# Altium PCB Inverter Processor PCB.PcbDoc (part 3 of 3)
Units mm, origin at the board's own origin, x right, y up, seen from the top; angles counter-clockwise.
Board outline 180 x 80 mm, 4 copper layers (Top Layer, Internal Plane 1, Internal Plane 2, Bottom Layer); 207 components, 146 nets, 658 pads, 294 vias.
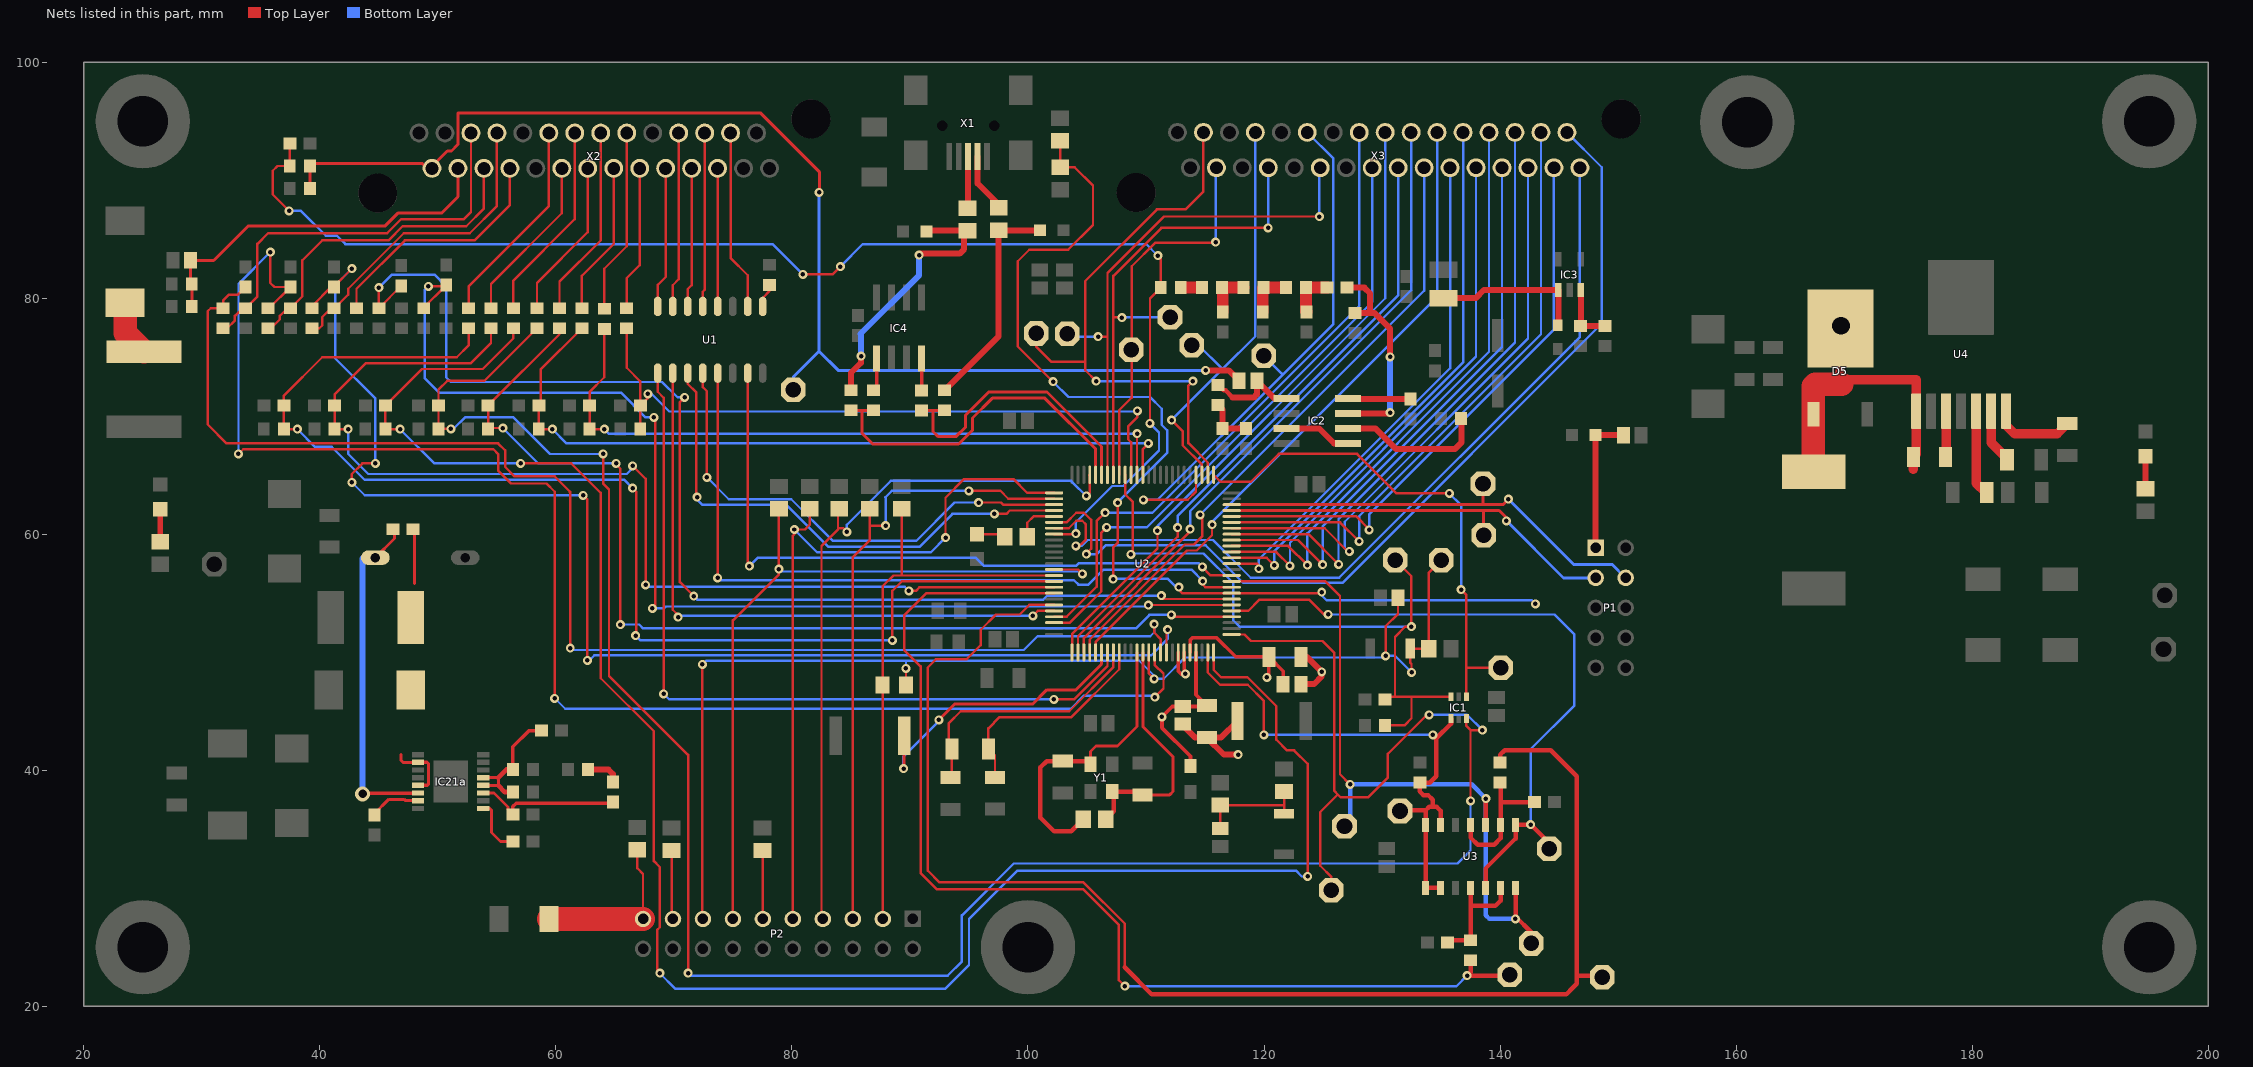
[diagram p4: the nets of this part, all layers, seen from the top]

## Via types
v1: diameter 0.762, hole 0.381, Top Layer to Bottom Layer, 220 vias
v2: diameter 1.27, hole 0.711, Top Layer to Bottom Layer, 56 vias
v3: diameter 1, hole 0.5, Top Layer to Bottom Layer, 7 vias
v4: diameter 2, hole 1, Top Layer to Bottom Layer, 7 vias
v5: diameter 3, hole 1.5, Top Layer to Bottom Layer, 2 vias
v6: diameter 1.27, hole 0.7, Top Layer to Bottom Layer, 1 vias
v7: diameter 1, hole 0.381, Top Layer to Bottom Layer, 1 vias

## Nets (pads, with @x,y where several pads share a name; then routed paths per layer and width w, separated by ;. In a path a pad name is that pad's centre, name@x,y a point inside that pad or via, vN(x,y) a via of type N, cw(c..) or ccw(c..) an arc to the next point about the centre after c; other vN are vias at no path point) (continued)
ENC_Z/R1: C24.2 R70.2 R73.2 TP37.TP X2.2 | length 107.6
  Top Layer w0.254: R70.2@39.15,89.3 R73.2@39.15,91.2 39.35,91.4 48.7,91.4 X2.2@49.1,91 ; X2.2@49.5,91.181 50.8,92.481 51.156,92.481 51.689,93.015 51.689,95.707 77.318,95.707 82.321,90.703 82.321,89.002 v1(82.296,88.976)
  Top Layer w0.508: X2.2@49.1,91 X2.2@49.5,91 X2.2@49.5,91.181 ; v1(115.062,73.889) 117.011,73.889 C24.2@117.9,73
  Bottom Layer w0.254: TP37.TP@80.112,72.238 80.112,73.33 82.296,75.514 ; v1(82.296,88.976) 82.296,75.514 ; v1(115.062,73.889) 83.922,73.889 82.296,75.514
  Bottom Layer w0.508: X2.2@49.5,91 X2.2@49.5,91.5
FLT_UH: U2.97 X3.15 | length 54.7
  Top Layer w0.203: U2.97@102.21,53.007 103.274,53.007 105.816,55.55 105.816,61.112 v1(106.528,61.824)
  Bottom Layer w0.203: v1(106.528,61.824) 110.541,61.824 128.066,79.349 X3.15@128.066,94.045
FLT_UL: U2.98 X3.16 | length 52.5
  Top Layer w0.203: U2.98@102.21,52.507 103.561,52.507 106.223,55.169 106.223,60.147 v1(106.655,60.579)
  Bottom Layer w0.203: v1(106.655,60.579) 110.058,60.579 129.166,79.687 X3.16@129.166,91.049
FLT_VH: U2.5 X3.21 | length 56.5
  Top Layer w0.203: U2.5@105.735,49.982 105.735,50.871 113.487,58.623 114.3,58.623 115.595,59.919 v1(115.595,60.808)
  Bottom Layer w0.203: v1(115.595,60.808) 115.595,61.036 134.666,80.107 X3.21@134.666,94.049
FLT_VL: U2.38 X3.22 | length 43.3
  Top Layer w0.203: U2.38@117.26,57.507 119.404,57.507 119.558,57.353 v1(119.558,57.074)
  Bottom Layer w0.203: v1(119.558,57.074) 119.558,57.861 135.766,74.07 X3.22@135.766,91.049
FLT_WH: U2.43 X3.27 | length 52.9
  Top Layer w0.203: U2.43@117.26,60.007 123.762,60.007 v1(126.314,57.455)
  Bottom Layer w0.203: v1(126.314,57.455) 126.314,61.29 141.266,76.242 X3.27@141.266,94.049
FLT_WL: U2.44 X3.28 | length 49.9
  Top Layer w0.203: U2.44@117.26,60.507 125.142,60.507 127.102,58.547 v1(127.229,58.547)
  Bottom Layer w0.203: v1(127.229,58.547) 127.102,58.547 126.848,58.801 126.848,61.062 142.366,76.58 X3.28@142.366,91.049
LED: R20.1 U2.80 | length 3.7
  Top Layer w0.203: R20.1@99.934,59.792 99.934,60.97 100.471,61.507 U2.80@102.21,61.507
MTEMP+: R62.1 X2.8 | length 20.7
  Top Layer w0.203: R62.1@43.1,79.15 43.1,80.8 47.2,84.9 53.1,84.9 56.1,87.9 X2.8@56.1,91
MTEMP-: R64.1 R66.1 X2.7 | length 26.8
  Top Layer w0.203: R64.1@39.35,77.45 39.95,77.45 40.2,77.7 40.2,78.4 40.95,79.15 R66.1@41.2,79.15 41.25,79.15 42.4,80.3 42.4,80.8 47.1,85.5 52.7,85.5 55,87.8 X2.7@55,94
"Net3V3 LED_A": "3V3 LED.A" R104a.1 | length 2.8
  Top Layer w0.5: R104a.1@26.472,59.357 26.472,62.122
"Net5V LED_A": "5V LED.A" R104b.1 | length 2.8
  Top Layer w0.5: R104b.1@194.684,63.844 194.684,66.609
NetC1_1: C1.1 R4.1 R5.2 SW1.2 | length 9.3
  Top Layer w0.203: C1.1@116.3,35.05 R5.2@116.3,37.05 121.65,37.05 121.7,37.1 ; SW1.2@121.7,36.3 121.7,37.1 ; R4.1@121.7,38.2 121.7,37.1
NetC4_1: C4.1 U4.3 | length 3.9
  Top Layer w0.8: C4.1@177.728,66.548 177.8,66.62 U4.3@177.8,70.426
NetC4_2: C4.2 D5.1 D5.3 L4.1 U4.1 | length 28.1
  Top Layer w0.8: 166.549,72.543 166.7,72.695 ; D5.3@168.834,77.419 168.834,73.076 175.26,73.076 U4.1@175.26,70.426 175.26,66.78 C4.2@175.028,66.548 175.028,65.51
  Top Layer w2: 166.549,72.543 D5.1@166.549,70.169 166.549,65.325 L4.1@166.573,65.3 ; 166.7,72.695 168.935,72.695
  other v5: 168.885,77.673
NetC15_1: C15.1 R21.2 U3.4 U3.6 | length 10.3
  Top Layer w0.381: C15.1@135.55,25.4 135.75,25.6 R21.2@137.5,25.6 137.5,28.5 ; U3.4@137.5,30.04 137.5,28.5 ; U3.6@140.04,30.04 140.04,28.94 139.6,28.5 137.5,28.5
NetC22_1: C22.1 R35.2 U3.9 U3.11 | length 11.7
  Top Layer w0.381: U3.11@137.5,35.36 137.5,34.3 138.1,33.7 139.5,33.7 140.04,34.24 U3.9@140.04,35.36 140.04,37.4 ; R35.2@140,38.95 140.04,38.91 140.04,37.4 ; C22.1@142.9,37.3 140.14,37.3 140.04,37.4
NetC23_1: C23.1 C27.1 R45.2 | length 3.9
  Top Layer w1: C27.1@123.6,78.85 123.55,78.9 R45.2@123.55,80.9 C23.1@125.35,80.9
NetC23_2: C23.2 IC2.7 R49.2 | length 18.1
  Top Layer w0.508: C23.2@127.05,80.9 128.5,80.9 129,80.4 129,78.75 ; IC2.7@127.1,70.235 130.611,70.235 v1(130.683,70.307) ; R49.2@127.7,78.75 129,78.75 ; v1(130.683,75.032) 130.683,77.417 129.35,78.75 129,78.75
  Bottom Layer w0.508: v1(130.683,70.307) v1(130.683,75.032)
NetC24_1: C24.1 IC2.1 R58.2 | length 8.1
  Top Layer w0.381: R58.2@116.103,72.656 116.572,72.187 116.738,72.187 117.348,71.577 ; IC2.1@120.816,71.577 IC2.1@120.888,71.505
  Top Layer w0.508: 117.348,71.577 119.126,71.577 119.393,71.845 C24.1@119.393,73 IC2.1@120.816,71.577 ; IC2.1@120.888,71.505 IC2.1@121.9,71.505
NetC25_1: C25.1 R43.2 R44.1 | length 3.9
  Top Layer w1: C25.1@116.5,78.85 116.5,80.85 R43.2@116.45,80.9 R44.1@118.25,80.9
NetC26_1: C26.1 R44.2 R45.1 | length 4
  Top Layer w1: C26.1@119.9,78.85 119.9,80.85 R44.2@119.95,80.9 R45.1@121.85,80.9
NetC28_2: C28.2 IC2.8 | length 5.4
  Top Layer w0.508: IC2.8@127.1,71.505 127.155,71.45 C28.2@132.4,71.45 C28.2@132.349,71.479
NetC38_2: C38.2 C39.2 R58.1 | length 4.1
  Top Layer w0.508: R58.1@116.103,70.956 116.484,70.575 C38.2@116.484,68.973 118.44,68.973 C39.2@118.466,68.947
NetC50_1: C50.1 L3.2 P1.1 | length 11.9
  Top Layer w0.508: P1.1@148.1,58.84 L3.2@148.1,68.4 C50.1@150.45,68.4
NetC51_1: C51.1 R19.1 U2.12 Y1.1 | length 25.6
  Top Layer w0.203: Y1.1@105.022,40.771 Y1.1@105.298,40.495
  Top Layer w0.254: Y1.1@105.298,40.495 105.298,41.595 105.766,42.062 107.594,42.062 109.235,43.703 U2.12@109.235,49.982
  Top Layer w0.381: R19.1@104.689,35.839 103.673,34.823 102.21,34.823 101.041,35.992 101.041,40.234 101.578,40.771 C51.1@102.946,40.771 Y1.1@105.022,40.771
NetC52_1: C52.1 R19.2 U2.13 Y1.3 | length 20.9
  Top Layer w0.203: Y1.3@107.148,38.194 Y1.3@107.264,38.078 ; C52.1@109.427,38.194 C52.1@109.703,37.918
  Top Layer w0.254: C52.1@109.703,37.918 112.01,37.918 112.293,38.202 112.293,41.148 109.735,43.707 U2.13@109.735,49.982
  Top Layer w0.381: R19.2@106.589,35.839 107.264,36.515 Y1.3@107.264,38.078 ; Y1.3@107.148,38.194 C52.1@109.427,38.194
NetC56_1: C56.1 U4.7 | length 7
  Top Layer w0.8: U4.7@182.88,70.426 182.88,69.24 183.604,68.516 187.207,68.516 C56.1@188.062,69.371
NetC138a_1: C138a.1 D7a.C IC21a.6 | length 27.9
  Top Layer w0.254: D7a.C@44.652,57.965 D7a.C@44.697,58.01 46.323,59.636 C138a.1@46.323,60.378
  Top Layer w0.3: v2(43.617,37.999) 43.685,38.067 IC21a.6@48.309,38.067
  Bottom Layer w0.5: v2(43.617,37.999) 43.617,57.946 D7a.C@43.681,58.01
NetC138a_2: C138a.2 D8a.2 IC21a.2 IC21a.5 L5a.1 | length 10.1
  Top Layer w0.254: 46.886,41.328 46.886,40.82 47.039,40.667 IC21a.2@48.309,40.667 ; 48.023,55.845 C138a.2@48.023,60.378 ; 49.071,40.667 49.215,40.523 49.215,38.831 49.101,38.717
  Top Layer w0.3: IC21a.5@48.309,38.717 49.101,38.717 ; IC21a.2@48.309,40.667 49.071,40.667
NetC139a_1: C139a.1 C140a.1 IC21a.11 | length 12.7
  Top Layer w0.254: IC21a.11@53.845,38.067 54.752,38.067 55.936,36.883 55.936,36.668 C140a.1@56.356,36.248
  Top Layer w0.3: C140a.1@56.356,36.248 56.356,36.922 56.633,37.199 64.722,37.199 C139a.1@64.826,37.303
NetC139a_2: C139a.2 R106a.2 | length 2.9
  Top Layer w0.5: R106a.2@62.716,40.058 64.445,40.058 64.826,39.677 C139a.2@64.826,39.003
NetC141a_1: C141a.1 IC21a.9 | length 4.8
  Top Layer w0.254: IC21a.9@53.845,36.767 54.401,36.767 54.539,36.629 54.539,34.724 55.301,33.962 C141a.1@56.356,33.962
NetC142a_1: C142a.1 IC21a.7 | length 4.3
  Top Layer w0.254: C142a.1@44.633,36.209 44.633,36.329 45.84,37.536 47.137,37.536 47.256,37.417 IC21a.7@48.309,37.417
NetC143a_2: C143a.2 IC21a.12 IC21a.13 R105a.2 R107a.2 | length 11.1
  Top Layer w0.254: IC21a.12@53.845,38.717 55.118,38.717 55.118,39.367 IC21a.13@53.845,39.367
  Top Layer w0.3: R107a.2@56.356,40.058 56.356,42.002 57.714,43.36 C143a.2@58.769,43.36
  Top Layer w0.4: 55.118,38.717 55.682,38.153 R105a.2@56.356,38.153 ; 55.118,39.367 55.809,40.058 R107a.2@56.356,40.058
NetD1_1: D1.1 P2.19 R33.1 | length 14
  Top Layer w0.203: R33.1@66.9,33.25 66.9,31.7 67.38,31.22 P2.19@67.38,27.4
  Top Layer w2: D1.1@59.41,27.4 P2.19@67.38,27.4
NetD3_A: D3.A IC3.1 L2.2 | length 13.1
  Top Layer w0.203: D3.A@144.9,77.7 D3.A@144.95,77.75
  Top Layer w0.508: L2.2@135.204,80.004 137.941,80.004 138.637,80.7 IC3.1@144.95,80.7 D3.A@144.95,77.75
NetD4_2: D4.2 F1.1 | length 4.8
  Top Layer w2: D4.2@23.5,79.625 23.5,77.05 F1.1@25.1,75.45
NetIC2_3: IC2.3 IC2.5 | length 5.7
  Top Layer w0.508: IC2.3@121.9,68.965 124.659,68.965 125.929,67.695 IC2.5@127.1,67.695
NetIC2_6: IC2.6 R76.1 | length 12.7
  Top Layer w0.508: IC2.6@127.1,68.965 129.434,68.965 131.166,67.234 136.195,67.234 136.754,67.793 136.754,69.393 136.779,69.367 R76.1@136.779,69.825
NetIC3_3: IC3.3 R48.1 R59.2 | length 5.2
  Top Layer w0.508: IC3.3@146.85,80.7 146.85,77.7 R48.1@146.8,77.65 R59.2@148.9,77.65
NetLD1_C: LD1.C R20.2 | length 2.4
  Top Layer w0.203: LD1.C@95.682,59.995 97.831,59.995 R20.2@98.034,59.792
NetP2_11: P2.11 R29.1 | length 5.8
  Top Layer w0.203: R29.1@77.5,33.2 77.54,33.16 P2.11@77.54,27.4
NetP2_17: P2.17 R32.1 | length 5.8
  Top Layer w0.203: R32.1@69.8,33.2 69.8,27.52 P2.17@69.92,27.4
NetR2_1: R2.1 U4.6 | length 4.7
  Top Layer w0.8: U4.6@181.61,70.426 181.61,67.763 R2.1@183.054,66.319
NetR6_2: R6.2 U4.5 | length 7.2
  Top Layer w0.8: U4.5@180.34,70.426 180.34,64.342 R6.2@181.157,63.525
NetR14_2: R14.2 R16.2 U2.70 | length 24.7
  Top Layer w0.254: R14.2@90.983,70.473 91.936,70.473 91.948,70.485 ; R16.2@92.939,70.499 91.962,70.499 91.948,70.485 ; U2.70@106.235,65.032 106.235,67.437 101.612,72.06 96.672,72.06 94.717,70.104 94.717,69.088 93.929,68.301 92.354,68.301 91.948,68.707 91.948,70.485
NetR17_2: R17.2 R18.2 U2.71 | length 30.2
  Top Layer w0.254: R18.2@84.988,70.499 85.94,70.499 85.954,70.485 ; R17.2@86.893,70.499 85.967,70.499 85.954,70.485 ; U2.71@105.735,65.032 105.735,67.214 101.422,71.526 96.977,71.526 95.301,69.85 95.301,68.809 94.132,67.64 86.843,67.64 85.954,68.529 85.954,70.485
NetR42_2: R42.2 R43.1 | length 1.8
  Top Layer w1: R42.2@112.95,80.9 R43.1@114.75,80.9
NetR75_2: R75.2 U1.9 | length 2.2
  Top Layer w0.203: U1.9@77.52,79.3 77.52,80.02 78.1,80.6 R75.2@78.1,81.292
OUT_BRAKE: U1.12 X2.24 | length 11.7
  Top Layer w0.203: X2.24@73.7,91 73.7,79.31 U1.12@73.71,79.3
OUT_DCSW: U1.16 X2.20 | length 12
  Top Layer w0.203: U1.16@68.63,79.3 68.63,81.13 69.3,81.8 X2.20@69.3,91
OUT_ERR: U1.13 X2.23 | length 14.8
  Top Layer w0.203: U1.13@72.44,79.3 72.44,80.54 72.6,80.7 72.6,86.5 X2.23@72.6,94
OUT_OVTMP: U1.14 X2.22 | length 11.8
  Top Layer w0.203: U1.14@71.17,79.3 71.17,80.77 71.5,81.1 X2.22@71.5,91
OUT_PRE: U1.10 X2.25 | length 15.3
  Top Layer w0.203: X2.25@74.8,94 74.8,83.4 76.25,81.95 U1.10@76.25,79.3
OUT_TEMP: U1.15 X2.21 | length 14.9
  Top Layer w0.203: U1.15@69.9,79.3 69.9,81.1 70.4,81.6 X2.21@70.4,94
PA1/TIM2_CH2: IC1.1 R30.1 TP27.TP U2.24 U3.1 U3.2 U3.13 U3.14 | length 47.7
  Top Layer w0.203: U2.24@115.235,49.982 115.235,48.291 116.281,47.244 118.618,47.244 119.99,45.872 v1(119.99,43.002) ; v1(134.3,43) 134.6,42.7
  Top Layer w0.381: TP27.TP@131.521,36.551 131.561,36.59 133.69,36.59 ; U3.2@134.96,30.04 U3.1@133.69,30.04 U3.14@133.69,35.36 133.69,36.59 ; U3.13@134.96,35.36 134.96,36.56 134.62,36.9 134.31,36.9 ; IC1.1@135.85,44.375 135.85,43.95 134.6,42.7 134.6,39.5 134.05,38.95 R30.1@133.2,38.95 133.2,38.2 133.5,37.9 133.9,37.9 134.3,37.5 134.3,36.91 134.31,36.9 ; 133.69,36.59 134,36.9 134.31,36.9
  Bottom Layer w0.203: v1(119.99,43.002) 119.992,43 v1(134.3,43) v1@134.226,42.926
PA2/ADC2: C34.1 R38.2 R55.2 U2.25 | length 165.5
  Top Layer w0.203: C34.1@45.551,70.9 R55.2@45.55,68.9 v1(46.8,68.9) ; C34.1@45.551,70.9 48.651,74 53.8,74 56.4,76.6 R38.2@56.4,77.45 ; v1(57,66) 61.3,66 63.8,63.5 63.8,47.8 68.3,43.3 68.3,32.3 68.8,31.8 68.8,26.7 68.6,26.5 68.6,23 v1(68.8,22.8) ; U2.25@115.735,49.982 115.735,48.502 116.357,47.879 118.593,47.879 121.031,45.441 121.031,42.596 121.945,41.681 122.555,41.681 123.7,40.536 v1(123.7,31)
  Bottom Layer w0.203: v1(46.8,68.9) 49.7,66 v1(57,66) ; v1(68.8,22.8) 70.1,21.5 93,21.5 95,23.5 95,27.4 99.1,31.5 122.7,31.5 123.2,31 v1(123.7,31)
PA3/ADC3: C33.1 IC1.3 R39.2 R54.2 TP29.TP U2.26 | length 209.4
  Top Layer w0.203: v1(51.105,68.936) 50.085,68.936 R54.2@50.05,68.9 C33.1@50.05,70.9 50.05,72.25 50.8,73 53.95,73 R39.2@58.4,77.45 ; v1(64,66.8) 64,64.3 64.5,63.8 64.5,48 71.2,41.3 v1(71.2,22.8) ; U2.26@117.26,51.507 118.343,51.507 118.897,50.952 124.948,50.952 125.959,49.941 125.959,38.241 126.252,37.948 ; TP29.TP@125.705,29.82 125.705,30.963 124.765,31.902 124.765,36.46 126.252,37.948 ; v1(134,44.7) 133.8,44.7 130.5,41.4 130.5,39.4 128.8,37.7 126.5,37.7 126.252,37.948 ; IC1.3@137.15,44.375 137.15,43.75 137.5,43.4 ; v1(137.5,37.4) 137.5,43.4 ; v1(138.5,43.4) 137.5,43.4
  Bottom Layer w0.203: v1(51.105,68.936) 51.336,68.936 52.3,69.9 56.4,69.9 59.5,66.8 v1(64,66.8) ; v1(71.2,22.8) 71.4,22.6 93.2,22.6 94.4,23.8 94.4,27.7 98.8,32.1 136.4,32.1 137.5,33.2 v1(137.5,37.4) ; v1(134,44.7) 137.2,44.7 v1(138.5,43.4)
PA4/ADC4: C32.1 R40.2 R53.2 U2.29 | length 89.5
  Top Layer w0.203: v1(55.5,69) 54.35,69 54.251,68.901 C32.1@54.251,70.9 60.3,76.949 R40.2@60.3,77.45 ; v1(65.1,66) 65.1,65.912 65.456,65.556 v1(65.456,52.349) ; v1(112.141,53.162) 112.296,53.007 U2.29@117.26,53.007 U2.29@117.237,52.984
  Bottom Layer w0.203: v1(55.5,69) 58.5,66 v1(65.1,66) ; v1(65.456,52.349) 67.056,52.349 67.386,52.019 109.144,52.019 110.287,53.162 v1(112.141,53.162)
PA5/ADC5: TP33.TP U2.30 U3.5 U3.8 | length 58.6
  Top Layer w0.203: U2.30@117.26,53.507 118.658,53.507 119.583,54.432 123.85,54.432 125.083,53.2 v1(125.438,53.2)
  Top Layer w0.381: U3.5@138.77,30.04 138.77,31.67 141.31,34.21 U3.8@141.31,35.36 141.35,35.4 v1(142.6,35.4) 144.17,33.83 TP33.TP@144.17,33.35
  Bottom Layer w0.203: v1(125.438,53.2) 144.6,53.2 146.3,51.5 146.3,45.5 142.6,41.8 v1(142.6,35.4)
PA6/TIM3_CH1: C45.1 R68.1 U2.31 | length 98.1
  Top Layer w0.203: R68.1@48.8,79.15 48.8,79.2 C45.1@50.6,81 ; v1(49.2,81) C45.1@50.6,81 ; C45.1@50.7,81.1 C45.1@50.6,81 ; v1(68.174,53.721) 68.4,53.947 68.4,69.8 v1(68.3,69.9) ; v1(110.211,54) U2.31@117.024,54 ; U2.31@117.253,54 U2.31@117.26,54.007
  Bottom Layer w0.203: v1(49.2,81) 48.9,80.7 48.9,73.2 50.1,72 65.5,72 67.6,69.9 v1(68.3,69.9) ; v1(68.174,53.721) 69.164,53.721 69.317,53.873 110.084,53.873 v1(110.211,54)
PA7/TIM3_CH2: C43.1 R63.1 U2.32 | length 103.2
  Top Layer w0.203: v1(45,80.9) R63.1@45,79.15 C43.1@46.9,81.05 ; v1(70.9,71.6) 70.5,71.2 70.5,55.941 v1(71.679,54.762) ; v1(111.303,54.788) 111.303,54.635 111.431,54.507 U2.32@117.26,54.507
  Bottom Layer w0.203: v1(45,80.9) 46.1,82 49.7,82 50.7,81 50.7,73.3 51.1,72.9 69,72.9 70.3,71.6 v1(70.9,71.6) ; v1(71.679,54.762) 71.984,54.458 101.295,54.458 101.625,54.788 v1(111.303,54.788)
PA8/TIM_CH1: TP3.TP U2.67 X3.4 | length 32.4
  Top Layer w0.203: U2.67@107.735,65.032 107.735,70.524 108.788,71.577 108.788,82.702 110.769,84.684 115.824,84.684 v1(115.9,84.76)
  Bottom Layer w0.203: v1(115.9,84.76) 115.9,90.983 X3.4@115.966,91.049
PA9/TIM_CH2: TP5.TP U2.68 X3.8 | length 41.6
  Top Layer w0.203: U2.68@107.235,65.032 107.235,78.384 ; v1(107.95,78.359) 107.925,78.384 107.235,78.384 ; v1(120.345,85.954) 111.303,85.954 107.235,81.885 107.235,78.384
  Bottom Layer w0.203: v1(107.95,78.359) 107.925,78.384 TP5.TP@112.039,78.384 ; v1(120.345,85.954) 120.345,91.028 X3.8@120.366,91.049
PA10/TIM1_CH3: TP7.TP U2.69 X3.12 | length 44.7
  Top Layer w0.203: v1(105.943,76.733) 106.709,76.733 106.735,76.759 ; U2.69@106.735,65.032 106.735,76.759 ; v1(124.689,86.919) 111.531,86.919 106.735,82.122 106.735,76.759
  Bottom Layer w0.203: TP7.TP@103.327,76.733 v1(105.943,76.733) ; TP7.TP@103.327,76.987 103.327,77.089 TP7.TP@103.353,77.064 ; v1(124.689,86.919) 124.689,90.971 X3.12@124.766,91.049
PA11/CANRX: IC4.4 R14.1 | length 2.7
  Top Layer w0.305: R14.1@90.983,72.173 IC4.4@90.983,74.87
PA12/CANTX: IC4.1 R17.1 | length 2.8
  Top Layer w0.203: R17.1@86.893,72.198 R17.1@87.173,72.478
  Top Layer w0.305: R17.1@87.173,72.478 IC4.1@87.173,74.87
PB0/ADC8: TP31.TP TP36.TP U2.35 U3.7 U3.10 | length 61.8
  Top Layer w0.203: U2.35@117.26,56.007 125.197,56.007 126.441,54.762 126.441,39.659 v1(127.3,38.8)
  Top Layer w0.381: U3.10@138.77,35.36 138.8,35.39 v1(138.8,37.6) ; U3.7@141.31,30.04 141.31,27.61 142.646,26.273 TP31.TP@142.646,25.324
  Bottom Layer w0.381: TP36.TP@126.822,35.255 127.3,35.733 v1(127.3,38.8) 137.6,38.8 v1(138.8,37.6) 138.8,27.7 139.1,27.4 v1(141.3,27.4)
PB1/ADC9: U1.7 U2.36 | length 58.4
  Top Layer w0.203: U1.7@76.25,73.65 76.25,57.45 v1(76.4,57.3) ; v1(114.783,57.226) 114.783,57.201 115.476,56.507 U2.36@117.26,56.507
  Bottom Layer w0.203: v1(76.4,57.3) 77.114,58.014 95.555,58.014 96.228,57.34 104.102,57.34 104.292,57.531 114.478,57.531 v1(114.783,57.226)
PB5: C36.1 R36.2 R57.2 U2.91 | length 106.1
  Top Layer w0.203: v1(38.1,68.9) R57.2@36.95,68.9 36.951,68.901 C36.1@36.951,70.9 36.951,71.751 40.2,75 51.6,75 52.6,76 R36.2@52.6,77.45 ; v1(66.5,63.9) 66.8,63.6 66.8,51.458 v1(66.751,51.41) ; v1(88.5,51) 88.5,55.2 89.3,56 102.203,56 U2.91@102.21,56.007
  Bottom Layer w0.203: v1(38.1,68.9) 39.6,67.4 41,67.4 43.8,64.6 65.8,64.6 v1(66.5,63.9) ; v1(66.751,51.41) 67.161,51 v1(88.5,51)
PB6/TIM4_CH1: C35.1 R37.2 R56.2 U2.92 | length 93.2
  Top Layer w0.203: R56.2@41.25,68.9 v1(42.4,68.9) ; R56.2@41.25,68.9 C35.1@41.251,70.9 41.251,71.851 43.9,74.5 52.8,74.5 54.5,76.2 R37.2@54.5,77.45 ; v1(66.5,65.8) 67.6,64.7 v1(67.6,55.7) ; v1(89.9,55.2) 90.5,55.2 90.8,55.5 102.203,55.5 U2.92@102.21,55.507
  Bottom Layer w0.203: v1(42.4,68.9) 42.4,66.8 44.1,65.1 66,65.1 66.5,65.6 v1(66.5,65.8) ; v1(67.6,55.7) 67.75,55.55 89.55,55.55 v1(89.9,55.2)
PB7/TIM4_CH2: R21.1 TP26.TP U2.93 | length 94.4
  Top Layer w0.203: U2.93@102.21,55.007 91.407,55.007 89.5,53.1 89.5,50.2 90.9,48.8 90.9,31.3 92.3,29.9 104.7,29.9 107.7,26.9 107.7,22.2 v1(108.2,21.7)
  Top Layer w0.381: R21.1@137.5,23.9 137.5,22.9 v1(137.2,22.6) 140.735,22.6 TP26.TP@140.818,22.682
  Bottom Layer w0.203: v1(108.2,21.7) 136.3,21.7 v1(137.2,22.6)
PB8/TIM4_CH3: R35.1 TP35.TP U2.95 | length 120.8
  Top Layer w0.203: U2.95@102.21,54.007 100.107,54.007 99.3,53.2 97.3,53.2 96,51.9 96,50.6 94.8,49.4 92.2,49.4 91.5,48.7 91.5,31.5 92.5,30.5 104.7,30.5 108.2,27 108.2,23.3
  Top Layer w0.381: 108.2,23.3 110.5,21 145.6,21 146.2,21.6 146.5,21.9 146.5,22.606 ; R35.1@140,40.65 140,41.3 140.4,41.7 144.3,41.7 146.5,39.5 146.5,22.606 ; TP35.TP@148.666,22.454 148.514,22.606 146.5,22.606
PB9/TIM4_CH4: U1.2 U2.96 | length 52.9
  Top Layer w0.203: U1.2@69.9,73.65 69.9,53.6 70.358,53.142 v1(70.358,52.984) ; v1(100.406,53.086) 100.827,53.507 U2.96@102.21,53.507
  Bottom Layer w0.203: v1(70.358,52.984) 70.516,52.984 70.617,53.086 v1(100.406,53.086)
PB10/USART3_TX: P1.3 TP38.TP U2.47 | length 35.5
  Top Layer w0.254: U2.47@117.26,62.007 138.582,62.007 ; TP38.TP@138.608,59.919 138.608,61.982 138.582,62.007 ; v1(140.538,61.138) 140.538,61.397 139.929,62.007 138.582,62.007
  Bottom Layer w0.254: v1(140.538,61.138) 145.376,56.3 P1.3@148.1,56.3
PB11/USART3_RX: P1.4 TP39.TP U2.48 | length 38.1
  Top Layer w0.254: U2.48@117.26,62.507 138.506,62.507 ; TP39.TP@138.557,64.287 138.557,62.558 138.506,62.507 ; v1(140.716,62.967) 140.256,62.507 138.506,62.507
  Bottom Layer w0.254: v1(140.716,62.967) 146.228,57.455 149.485,57.455 P1.4@150.64,56.3
PB12/TIM1_BKIN: IC1.4 TP30.TP U2.51 | length 43.9
  Top Layer w0.203: U2.51@115.735,64.465 U2.51@115.735,65.032 116.327,64.44 118.897,64.44 121.26,66.802 127.889,66.802 131.23,63.461 v1(135.7,63.461) ; v1(136.7,55.3) 137.15,54.85 137.15,48.616 ; IC1.4@137.15,46.225 137.15,48.616 ; TP30.TP@140.056,48.692 137.226,48.692 137.15,48.616
  Bottom Layer w0.203: v1(135.7,63.461) 136.7,62.461 v1(136.7,55.3)
PC0/ADC10: C49.1 R72.2 U2.15 | length 128.2
  Top Layer w0.203: v1(33.1,66.8) 33.5,67.2 54.7,67.2 55.1,66.8 55.1,65.4 56.2,64.3 59.2,64.3 59.9,63.6 v1(59.9,46.1) ; R72.2@35.6,79.15 35.7,79.15 C49.1@37.5,80.95 36.15,80.95 35.8,81.3 v1(35.8,83.9) ; U2.15@110.735,49.982 110.735,48.93 111.481,48.184 111.481,46.939 v1(110.744,46.203)
  Bottom Layer w0.203: v1(33.1,66.8) 33.1,81.2 v1(35.8,83.9) ; v1(59.9,46.1) 60.788,45.212 103.632,45.212 104.75,46.33 110.617,46.33 v1(110.744,46.203)
PC1/ADC11: C46.1 R69.2 U2.16 | length 114.7
  Top Layer w0.203: C46.1@33.7,80.95 33.05,80.3 32.3,80.3 31.8,79.8 R69.2@31.8,79.15 30.75,79.15 30.5,78.9 30.5,69.3 32.1,67.7 55.1,67.7 55.7,67.1 55.7,65.7 56.5,64.9 59.9,64.9 61.2,63.6 ; 61.163,63.563 61.214,63.614 v1(61.214,50.343) ; v1(110.693,52.375) 110.693,51.664 111.235,51.122 U2.16@111.235,49.982
  Bottom Layer w0.203: v1(61.214,50.343) 61.366,50.19 99.644,50.19 100.813,51.359 110.363,51.359 110.693,51.689 v1(110.693,52.375)
PC2/ADC12: C44.1 R64.2 U2.17 | length 113.3
  Top Layer w0.203: R64.2@39.35,79.15 39.35,79.35 40.95,80.95 C44.1@41.2,80.95 41.2,81 v1(42.7,82.5) ; v1(42.7,64.4) 42.7,65.1 43.6,66 v1(44.7,66) ; v1(62.3,63.3) 62.662,62.938 v1(62.662,49.301) ; U2.17@111.735,49.982 111.735,51.816 v1(111.836,51.918)
  Bottom Layer w0.203: v1(42.7,64.4) 43.8,63.3 v1(62.3,63.3) ; v1(42.7,82.5) 41.3,81.1 41.3,74.9 44.7,71.5 v1(44.7,66) ; v1(62.662,49.301) 62.814,49.301 63.246,49.733 110.439,49.733 111.836,51.13 v1(111.836,51.918)
PC5/ADC15: U1.5 U2.34 | length 62.7
  Top Layer w0.203: v1(73.7,56.3) 73.7,73.64 U1.5@73.71,73.65 ; v1(114.808,56.032) 114.808,55.728 115.029,55.507 U2.34@117.26,55.507
  Bottom Layer w0.203: v1(73.7,56.3) 73.9,56.1 103.895,56.1 104.267,55.728 105.131,55.728 106.401,56.998 113.843,56.998 v1(114.808,56.032) v1@114.63,55.855
PC6: C31.1 R41.2 R52.2 U2.63 | length 65.1
  Top Layer w0.203: C31.1@58.551,70.9 R52.2@58.55,68.9 v1(59.7,68.9) ; C31.1@58.551,70.9 58.7,71.049 58.7,73.95 R41.2@62.2,77.45 ; U2.63@109.735,65.032 109.735,67.215 v1(110.211,67.691)
  Bottom Layer w0.203: v1(59.7,68.9) 60.9,67.7 v1@110.185,67.7
PC7: C30.1 R46.2 R51.2 U2.64 | length 59.1
  Top Layer w0.203: C30.1@62.851,70.9 R51.2@62.85,68.9 v1(64.1,68.9) ; C30.1@62.851,70.9 62.851,72.051 64.1,73.3 R46.2@64.1,77.4 ; U2.64@109.235,65.032 109.235,68.518 v1(109.245,68.529)
  Bottom Layer w0.203: v1(64.1,68.9) 64.5,68.5 64.529,68.529 v1(109.245,68.529)
PC8: C29.1 R47.2 R50.2 U2.65 | length 58.3
  Top Layer w0.203: R47.2@66,77.45 66,74.1 67.151,72.949 C29.1@67.151,70.9 ; R50.2@67.15,68.9 C29.1@67.151,70.9 ; v1(67.8,71.9) 67.8,71.549 C29.1@67.151,70.9 ; U2.65@108.735,65.032 108.735,67.795 108.483,68.047 108.483,69.139 109.271,69.926 v1(109.271,70.46)
  Bottom Layer w0.203: v1(67.8,71.9) 68.1,71.9 69.6,70.4 109.211,70.4 v1(109.271,70.46)
PC9: C21.1 IC1.6 R34.1 TP34.TP U2.66 | length 58.5
  Top Layer w0.203: U2.66@108.235,65.032 108.235,63.393 108.864,62.763 108.864,58.268 108.839,58.293 v1(108.712,58.293) ; R34.1@130.25,43.8 131.9,43.8 132.5,44.4 132.5,46.225 ; C21.1@130.25,46 130.475,46.225 131.1,46.225 ; TP34.TP@131.115,57.81 132.486,56.439 v1(132.486,52.172) 131.972,52.172 131.1,51.3 131.1,46.225 ; IC1.6@135.85,46.225 132.5,46.225 ; 131.1,46.225 132.5,46.225
  Bottom Layer w0.203: v1(108.712,58.293) 108.788,58.369 114.884,58.369 117.399,55.855 117.399,52.705 117.932,52.172 v1(132.486,52.172)
PC10: U1.4 U2.78 | length 42
  Top Layer w0.203: U1.4@72.44,73.65 72.44,72.467 72.796,72.111 v1(72.796,64.821) ; v1(95.809,62.687) 97.714,62.687 97.894,62.507 U2.78@102.21,62.507
  Bottom Layer w0.203: v1(72.796,64.821) 74.651,62.967 79.934,62.967 83.464,59.436 90.526,59.436 93.777,62.687 v1(95.809,62.687)
PC11: U1.3 U2.79 | length 44.2
  Top Layer w0.203: U1.3@71.17,73.65 71.17,72.73 71.9,72 71.9,63.203 v1(71.958,63.144) ; v1(97.155,61.722) 98.171,61.722 98.456,62.007 U2.79@102.21,62.007
  Bottom Layer w0.203: v1(71.958,63.144) 71.958,62.941 72.415,62.484 79.527,62.484 83.083,58.928 90.805,58.928 93.599,61.722 v1(97.155,61.722)
PC13: U1.1 U2.7 | length 67.8
  Top Layer w0.203: U1.1@68.63,73.65 68.63,72.07 69.13,71.57 v1(69.13,46.47) ; v1(102.184,45.999) 103.886,45.999 106.735,48.848 U2.7@106.735,49.982
  Bottom Layer w0.203: v1@69.113,46.203 v1(69.13,46.47) 69.601,45.999 v1(102.184,45.999)
PD2/TIM3_ETR: C48.1 R42.1 R73.1 U2.83 | length 114.6
  Top Layer w0.203: v1(37.4,87.4) 36,88.8 36,90.8 36.4,91.2 R73.1@37.45,91.2 C48.1@37.45,93.1 ; v1(80.924,82.017) 83.439,82.017 v1(84.099,82.677) ; U2.83@102.21,60.007 v1@104.064,60.007 ; v1(104.064,60.046) v1@104.19,60.046 ; v1(110.338,69.393) 110.338,79.987 R42.1@111.25,80.9 111.25,83.35 v1(111,83.6)
  Bottom Layer w0.203: v1(37.4,87.4) 38.4,87.4 40.507,85.293 41.453,85.293 42.164,84.582 78.359,84.582 v1(80.924,82.017) ; v1(84.099,82.677) 86.004,84.582 110.018,84.582 v1(111,83.6) ; v1(104.064,60.046) 104.064,61.011 107.137,64.084 108.077,64.084 111.1,67.107 111.1,68.631 v1(110.338,69.393)
RDY_UH: U2.1 X3.17 | length 55.1
  Top Layer w0.203: U2.1@103.735,49.982 103.735,51.538 110.973,58.776 v1(110.973,60.3)
  Bottom Layer w0.203: v1(110.973,60.3) 110.973,60.706 130.266,80 X3.17@130.266,94.049
RDY_UL: U2.2 X3.18 | length 52.3
  Top Layer w0.203: U2.2@104.235,49.982 104.235,51.352 112.674,59.792 v1(112.674,60.554)
  Bottom Layer w0.203: v1(112.674,60.554) 112.674,61.544 131.366,80.236 X3.18@131.366,91.049
RDY_VH: U2.39 X3.23 | length 47.2
  Top Layer w0.203: U2.39@117.26,58.007 120.225,58.007 v1(120.879,57.353)
  Bottom Layer w0.203: v1(120.879,57.353) 120.879,58.572 136.866,74.56 X3.23@136.866,94.049
RDY_VL: U2.40 X3.24 | length 45.7
  Top Layer w0.203: U2.40@117.26,58.507 121.02,58.507 v1(122.199,57.328)
  Bottom Layer w0.203: v1(122.199,57.328) 122.199,59.284 137.966,75.051 X3.24@137.966,91.049
RDY_WH: U2.45 X3.29 | length 52.5
  Top Layer w0.203: U2.45@117.26,61.007 126.445,61.007 v1(128.067,59.385)
  Bottom Layer w0.203: v1(128.067,59.385) 128.067,61.544 143.466,76.944 X3.29@143.466,94.049
RDY_WL: U2.46 X3.30 | length 49.3
  Top Layer w0.203: U2.46@117.26,61.507 127.825,61.507 128.905,60.427 v1(128.905,60.376)
  Bottom Layer w0.203: v1(128.905,60.376) 128.905,61.671 144.566,77.333 X3.30@144.566,91.049
RST: C11.1 P2.15 R12.1 R27.1 SW2.2 TP32.TP U2.14 | length 105.4
  Top Layer w0.203: v1(72.415,48.971) 72.415,27.725 72.6,27.54 P2.15@72.46,27.4 ; R27.1@89.662,47.219 v1(89.662,48.641) ; U2.14@110.235,49.982 110.235,48.211 v1(110.693,47.752) ; v1(130.3,49.7) 130.3,52.2 131.35,53.25 C11.1@131.35,54.6 ; v1(132.5,48.3) 132.5,49 132.4,49.1 SW2.2@132.4,50.3 R12.1@133.95,50.3 133.95,56.709 TP32.TP@135.026,57.785
  Bottom Layer w0.203: v1(72.415,48.971) 72.72,49.276 89.662,49.276 ; v1(89.662,48.641) 89.662,49.276 ; v1(132.5,48.3) 131.1,49.7 v1(130.3,49.7) 130.155,49.555 113.309,49.555 111.506,47.752 v1(110.693,47.752) 110.693,48.006 109.423,49.276 89.662,49.276
RST_UH: U2.3 X3.19 | length 55.6
  Top Layer w0.203: U2.3@104.735,49.982 104.735,51.217 113.741,60.223 v1(113.741,60.427)
  Bottom Layer w0.203: v1(113.741,60.427) 113.741,61.951 132.466,80.676 X3.19@132.466,94.049
RST_UL: U2.4 X3.20 | length 53.4
  Top Layer w0.203: U2.4@105.235,49.982 105.235,51.082 113.284,59.131 114.071,59.131 114.783,59.842 114.783,61.443 v1(114.579,61.646)
  Bottom Layer w0.203: v1(114.579,61.646) 133.566,80.633 X3.20@133.566,91.049
RST_VH: U2.41 X3.25 | length 50.1
  Top Layer w0.203: U2.41@117.26,59.007 122.044,59.007 v1(123.673,57.379)
  Bottom Layer w0.203: v1(123.673,57.379) 123.673,60.071 139.066,75.465 X3.25@139.066,94.049
RST_VL: U2.42 X3.26 | length 48.5
  Top Layer w0.203: U2.42@117.26,59.507 122.89,59.507 v1(124.968,57.429)
  Bottom Layer w0.203: v1(124.968,57.429) 124.968,60.653 140.166,75.852 X3.26@140.166,91.049
RST_WH: U2.81 X3.31 | length 79
  Top Layer w0.203: U2.81@102.21,61.007 103.273,61.007 104.089,61.824 104.75,61.824 105.359,61.214 105.359,58.776 104.877,58.293 104.953,58.217 105.054,58.318 v1(104.953,58.318)
  Bottom Layer w0.203: v1(104.953,58.318) 105.842,58.318 106.578,59.055 115.062,59.055 118.237,55.88 126.644,55.88 148.615,77.851 148.615,80.467 148.615,91.1 X3.31@145.666,94.049
RST_WL: U2.82 X3.32 | length 73.2
  Top Layer w0.203: U2.82@102.21,60.507 103.458,60.507 104.089,61.138 104.597,61.138 104.902,60.833 104.902,59.563 104.064,58.725 v1(104.064,59.004)
  Bottom Layer w0.203: v1(104.064,59.004) 104.064,58.725 104.343,59.004 104.546,59.004 105.054,59.512 115.672,59.512 118.872,56.312 126.365,56.312 146.766,76.713 X3.32@146.766,91.049
S4/S1: C42.1 R60.1 R65.2 X2.4 | length 31.2
  Top Layer w0.254: R60.1@29.15,79.3 R65.2@29.15,81.2 29.05,81.3 C42.1@29.05,83.2 31,83.2 33.9,86.1 45.5,86.1 46.6,87.2 50.3,87.2 51.7,88.6 X2.4@51.7,91
SIG_BMS: R47.1 X2.18 | length 12.3
  Top Layer w0.203: R47.1@66,79.15 66,81.7 67.1,82.8 X2.18@67.1,91
SIG_BRAKE: R38.1 X2.13 | length 17
  Top Layer w0.203: R38.1@56.4,79.15 56.4,81.5 61.6,86.7 X2.13@61.6,94
SIG_CRUISE: R36.1 X2.11 | length 17.7
  Top Layer w0.203: R36.1@52.6,79.15 52.6,81 59.4,87.8 X2.11@59.4,94
SIG_EMCYSTOP: R46.1 X2.17 | length 15.7
  Top Layer w0.203: R46.1@64.1,79.1 64.1,82.5 66,84.4 X2.17@66,94
SIG_FORWARD: R40.1 X2.15 | length 16.3
  Top Layer w0.203: R40.1@60.3,79.15 60.3,81.4 63.8,84.9 X2.15@63.8,93.996
SIG_MPROT: R39.1 X2.14 | length 13.6
  Top Layer w0.203: R39.1@58.4,79.15 58.4,81.3 62.7,85.6 X2.14@62.7,91
SIG_REVERSE: R41.1 X2.16 | length 13
  Top Layer w0.203: R41.1@62.2,79.15 62.2,81.9 64.9,84.6 X2.16@64.9,91
SIG_START: R37.1 X2.12 | length 14.3
  Top Layer w0.203: R37.1@54.5,79.15 54.5,81.2 60.5,87.2 X2.12@60.5,91
TCK: P2.9 R23.1 U2.76 | length 63.7
  Top Layer w0.203: P2.9@80.08,27.4 80.08,59.88 80.2,60 v1(80.2,60.4) 81.1,60.4 81.5,60.8 R23.1@81.5,62.15 ; v1(93.015,59.715) 93.015,63.094 94.59,64.668 98.781,64.668 99.942,63.507 U2.76@102.21,63.507
  Bottom Layer w0.203: v1(80.2,60.4) 82.129,58.471 91.77,58.471 v1(93.015,59.715)
TDI: P2.5 R25.1 U2.77 | length 53.9
  Top Layer w0.203: P2.5@85.16,27.4 85.16,58.06 86.6,59.5 86.6,60.681 ; R25.1@86.6,62.15 86.6,60.681 ; v1(87.935,60.731) 86.651,60.731 86.6,60.681 ; v1(94.996,63.678) 97.663,63.678 98.334,63.007 U2.77@102.21,63.007
  Bottom Layer w0.203: v1(87.935,60.731) 87.935,63.094 87.909,63.119 88.468,63.678 v1(94.996,63.678)
TDO: P2.13 R22.1 U2.89 | length 65.1
  Top Layer w0.203: P2.13@75,27.4 75,52.7 78.892,56.592 v1(78.892,57.048) 78.892,61.958 78.8,62.05 R22.1@78.9,62.15 ; U2.89@102.21,57.007 104.248,57.007 v1(104.605,56.65)
  Bottom Layer w0.203: v1(78.892,57.048) 78.892,56.896 78.842,56.845 104.41,56.845 v1(104.605,56.65) v1@104.665,56.65
THROTTLE1: R69.1 R71.2 X2.5 | length 34.6
  Top Layer w0.203: R69.1@31.8,77.45 32.15,77.45 32.8,78.1 32.8,78.5 33.45,79.15 R71.2@33.7,79.15 34.7,80.15 34.7,84.6 35.6,85.5 45.7,85.5 46.9,86.7 52.2,86.7 52.8,87.3 X2.5@52.8,94
THROTTLE2: R72.1 R74.2 X2.6 | length 27.9
  Top Layer w0.203: R72.1@35.6,77.45 35.85,77.45 36.6,78.2 36.6,78.5 37.25,79.15 R74.2@37.5,79.15 38.5,80.15 38.5,83.2 40.2,84.9 45.8,84.9 47,86.1 52.4,86.1 53.9,87.6 X2.6@53.9,91
TIM1_CH1N: TP2.TP U2.52 X3.3 | length 49.8
  Top Layer w0.203: TP2.TP@100.711,77.013 100.711,75.87 101.981,74.6 104.851,74.6 ; v1(105.766,72.974) 104.851,73.889 104.851,74.6 ; v1(113.97,72.974) 113.589,72.593 113.589,67.716 115.235,66.071 U2.52@115.235,65.032 ; X3.3@114.866,94.049 114.866,89.035 113.36,87.528 110.922,87.528 104.851,81.458 104.851,74.6
  Bottom Layer w0.203: v1(105.766,72.974) v1(113.97,72.974)
TIM1_CH2N: TP4.TP U2.53 X3.7 | length 36.6
  Top Layer w0.203: v1(112.166,69.672) 113.106,68.732 113.106,67.539 114.735,65.91 U2.53@114.735,65.032
  Bottom Layer w0.203: v1(112.166,69.672) 116.484,73.99 ; TP4.TP@113.741,76.048 114.427,76.048 116.484,73.99 ; X3.7@119.266,94.049 119.266,76.772 116.484,73.99
TIM1_CH3N: TP6.TP U2.54 X3.11 | length 47.9
  Top Layer w0.203: v1(109.779,62.916) 113.538,62.916 114.235,63.612 U2.54@114.235,65.032
  Bottom Layer w0.203: v1(109.779,62.916) 110.973,62.916 121.641,73.584 ; TP6.TP@119.964,75.133 121.514,73.584 121.641,73.584 ; X3.11@123.666,94.049 125.882,91.833 125.882,77.826 121.641,73.584
TMS: P2.7 R24.1 U2.72 | length 61.5
  Top Layer w0.203: P2.7@82.62,27.4 82.4,27.62 82.5,27.72 82.5,59 83.9,60.4 83.9,60.503 ; R24.1@83.9,62.15 83.9,60.503 ; v1(84.658,60.198) 84.353,60.503 83.9,60.503 ; v1(104.953,63.246) 105.235,63.528 U2.72@105.235,65.032 U2.72@105.207,65.004
  Bottom Layer w0.203: v1(84.658,60.198) 84.658,60.808 88.367,64.516 103.657,64.516 v1@105.131,63.043
TRST: P2.3 R26.1 R27.2 U2.90 | length 48.7
  Top Layer w0.203: P2.3@87.7,27.4 87.7,55.6 88.6,56.5 89.281,56.5 ; R26.1@89.3,62.15 89.3,56.519 89.281,56.5 ; U2.90@102.21,56.507 102.203,56.5 89.281,56.5
USB_D+: R10.2 X1.3 | length 4.4
  Top Layer w0.508: R10.2@94.869,87.615 94.93,87.675 X1.3@94.93,92.015
USB_D-: R11.2 X1.2 | length 5.1
  Top Layer w0.508: X1.2@95.73,92.015 95.73,89.716 97.511,87.935 R11.2@97.511,87.666
USB_P: R13.2 R15.1 U2.33 | length 92.2
  Top Layer w0.203: v1(102.133,72.923) 99.136,75.921 99.136,83.134 100.101,84.099 103.403,84.099 105.512,86.208 105.512,89.535 103.962,91.084 R15.1@102.743,91.084 102.718,91.11 R13.2@102.718,93.335 ; v1(107.213,56.185) 107.213,58.877 107.594,59.258 v1(107.594,62.687) ; v1(112.776,55.524) 112.776,55.296 113.065,55.007 U2.33@117.26,55.007 124.806,55.007 v1(124.892,55.093)
  Bottom Layer w0.203: v1(102.133,72.923) 103.429,71.628 110.338,71.628 111.328,70.637 111.328,69.266 111.785,68.809 111.785,66.878 v1(107.594,62.687) ; v1(107.213,56.185) 107.061,56.185 107.01,56.236 111.836,56.236 112.547,55.524 v1(112.776,55.524) ; v1(124.892,55.093) 124.892,54.815 125.306,54.4 142.7,54.4 v1(143,54.1)
USBDM: R11.1 R16.1 Z2.1 | length 19
  Top Layer w0.203: R11.1@97.511,85.766 R11.1@97.526,85.75
  Top Layer w0.508: R16.1@92.939,72.198 97.511,76.77 R11.1@97.511,85.766 ; R11.1@97.526,85.75 Z2.1@101.006,85.75
USBDP: R10.1 R18.1 Z1.1 | length 22.7
  Top Layer w0.203: Z1.1@91.399,85.649 Z1.1@91.465,85.715
  Top Layer w0.508: R18.1@84.988,72.198 84.988,73.66 85.852,74.524 v1(85.852,75.082) ; v1(90.78,83.642) 90.907,83.769 94.209,83.769 94.59,84.15 94.59,85.715 Z1.1@91.465,85.715
  Bottom Layer w0.508: v1(85.852,75.082) 85.852,76.911 85.801,76.962 90.78,81.94 v1(90.78,83.642)
VBAT: R1.2 U2.6 | length 24.9
  Top Layer w0.203: v1(89.459,40.132) v1@89.514,40.187
  Top Layer w0.254: v1@89.514,40.187 R1.2@89.514,42.926 ; v1(92.456,44.272) 93.777,45.593 100.381,45.593 101.6,46.812 104.064,46.812 106.235,48.983 U2.6@106.235,49.982
  Bottom Layer w0.254: v1(89.459,40.132) 89.459,41.173 v1@92.456,44.171
  Bottom Layer w0.381: v1@92.456,44.171 v1(92.456,44.272)
VDDA: C7.1 C8.1 C12.1 C14.1 L1.2 U2.21 U2.22 | length 27.1
  Top Layer w0.203: C8.1@114.868,45.403 C8.1@114.91,45.444
  Top Layer w0.305: U2.21@113.735,49.982 113.735,51.022 113.955,51.243 115.966,51.243 117.602,49.606 C14.1@120.418,49.606 ; L1.2@113.767,40.368 113.767,41.173 111.354,43.586 v1(111.354,44.526) 112.231,45.403 C7.1@113.132,45.403 C8.1@114.868,45.403 ; U2.22@114.235,49.982 114.235,46.399 C8.1@115.164,45.47 ; v1(120.244,47.879) 120.418,48.053 C14.1@120.418,49.606 ; C12.1@121.627,47.295 121.627,48.397 C14.1@120.418,49.606
VSSA: C7.2 C8.2 C12.2 C14.2 R9.1 U2.19 U2.20 | length 17.9
  Top Layer w0.305: U2.19@112.735,49.982 112.735,48.403 112.979,48.158 v1(113.335,48.158) 113.235,48.259 U2.20@113.235,49.982
  Top Layer w0.508: C7.2@113.03,43.903 114.163,42.77 C8.2@115.164,42.77 ; R9.1@117.75,44.171 116.349,42.77 C8.2@115.164,42.77 ; v1(117.805,41.326) 116.608,41.326 C8.2@115.164,42.77 ; C14.2@123.118,49.606 123.622,49.606 v1(124.892,48.336) 124.892,47.955 124.231,47.295 C12.2@123.127,47.295
XIN32: C16.2 U2.8 Y2.P$2 | length 21.9
  Top Layer w0.203: C16.2@93.447,39.374 93.55,39.477 Y2.P$2@93.55,41.8 93.3,42.05 93.3,44 94.3,45 103.496,45 107.235,48.738 U2.8@107.235,49.982
XOUT32: C20.2 U2.9 Y2.P$1 | length 19
  Top Layer w0.203: C20.2@97.206,39.399 97.206,41.244 Y2.P$1@96.65,41.8 96.65,43.55 97.6,44.5 103.682,44.5 107.735,48.553 U2.9@107.735,49.982
pads on no net: IC21a.1 IC21a.16 P1.5 P1.6 P1.7 P1.8 P1.9 P1.10 U1.11 U2.37 U2.55 U2.56 U2.57 U2.58 U2.59 U2.60 U2.61 U2.62 U2.73 U2.84 U2.85 U2.86 U2.87 U2.88 X1.4 X1.10 X1.11 X2.29 X2.30 X3.33 X3.34

## Polygon pours and split planes (outlines as drawn)
DGND on Top Layer "DGND_L01_P016" (solid, pour order 16): 175.92,76.048 198.171,76.048 198.171,89.56 187.935,89.56 187.884,89.611 187.884,98.349 175.946,98.349 175.92,98.374
NetC138a_2 on Top Layer "SW" (solid, pour order 8): 46.094,56.105 50.666,56.105 50.793,55.978 50.793,43.786 47.872,43.786 47.237,43.151 47.237,41.246 46.094,41.246
+12V on Top Layer "Vin2" (solid, pour order 10): 29.614,37.391 40.536,37.391 40.536,40.185 48.791,40.185 48.791,39.169 41.966,39.169 41.966,33.581 29.614,33.581
+3V3 on Top Layer "+3V3" (solid, pour order 12): 41.839,50.218 34.092,50.218 34.092,59.87 41.839,59.87
+3V3 on Top Layer "+3V3" (solid, pour order 14): 39.553,57.711 42.347,57.711 42.347,58.854 45.063,61.57 50.602,61.57 50.602,56.949 50.729,56.949 51.872,55.806 54.539,55.806 54.539,63.475 42.347,63.475 42.347,60.505 39.553,60.505 39.553,60.124
DGND on Bottom Layer "DGND_L04_P018" (solid, pour order 18): 175.87,76.048 198.171,76.048 198.171,89.56 187.884,89.56 187.884,98.349 175.895,98.349 175.87,98.374
VSSA on Internal Plane 1 (split plane): 117.689,50.749 117.696,50.699 117.715,50.653 117.746,50.613 117.785,50.583 117.832,50.564 117.881,50.557 125.766,50.557 125.766,46.395 118.948,46.395 118.898,46.388 118.852,46.369 118.812,46.338 118.782,46.299 118.763,46.252 118.756,46.203 118.756,41.783 118.756,38.622 113.171,38.622 113.171,41.783 113.165,41.833 113.146,41.879 113.115,41.919 113.075,41.949 113.029,41.969 112.979,41.975 112.966,41.973 112.954,41.975 109.565,41.975 109.565,53.656 117.689,53.656
DGND on Internal Plane 1 (split plane): 199.49,20.51 20.51,20.51 20.51,99.49 199.49,99.49
VDDA on Internal Plane 2 (split plane): 117.638,50.749 117.645,50.699 117.664,50.653 117.695,50.613 117.735,50.583 117.781,50.564 117.831,50.557 123.785,50.557 123.785,48.981 123.785,47.984 123.785,46.407 118.948,46.407 118.898,46.401 118.852,46.382 118.812,46.351 118.782,46.311 118.763,46.265 118.756,46.215 118.756,41.681 118.756,39.13 109.565,39.13 109.565,52.273 109.565,53.58 117.638,53.58
+5V on Internal Plane 2 (split plane): 108.28,99.45 108.271,99.4 108.28,99.35 108.308,99.308 108.35,99.28 108.4,99.271 199.271,99.271 199.271,46.002 155.102,46.002 155.102,61.1 155.102,78.6 155.093,78.698 155.064,78.792 155.018,78.879 154.955,78.955 154.879,79.018 154.792,79.064 154.698,79.093 154.6,79.102 134.5,79.102 134.402,79.093 134.308,79.064 134.221,79.018 134.145,78.955 134.082,78.879 134.036,78.792 134.007,78.698 133.998,78.6 133.998,32 134.007,31.902 134.036,31.808 134.082,31.721 134.145,31.645 134.221,31.582 134.308,31.536 134.402,31.507 134.5,31.498 136.698,31.498 136.698,27.702 129.202,27.702 129.202,84 129.193,84.098 129.164,84.192 129.118,84.279 129.055,84.355 128.979,84.418 128.892,84.464 128.798,84.493 128.7,84.502 92.735,84.502 92.637,84.493 92.543,84.464 92.456,84.418 92.38,84.355 92.318,84.279 92.271,84.192 92.243,84.098 92.233,84 92.233,74.002 82.138,74.002 82.138,83.8 82.128,83.898 82.1,83.992 82.053,84.079 81.991,84.155 81.915,84.218 81.828,84.264 81.734,84.293 81.636,84.302 51.8,84.302 51.702,84.293 51.608,84.264 51.521,84.218 51.445,84.155 51.382,84.079 51.336,83.992 51.307,83.898 51.298,83.8 51.298,76.902 26.802,76.902 26.802,79.998 36.3,79.998 36.398,80.007 36.492,80.036 36.579,80.082 36.655,80.145 36.718,80.221 36.764,80.308 36.793,80.402 36.802,80.5 36.802,90.098 41.298,90.098 41.298,87.9 41.307,87.802 41.336,87.708 41.382,87.621 41.445,87.545 41.521,87.482 41.608,87.436 41.702,87.407 41.8,87.398 89.535,87.398 89.633,87.407 89.727,87.436 89.814,87.482 89.89,87.545 89.953,87.621 89.999,87.708 90.028,87.802 90.037,87.9 90.037,99.49 108.307,99.49
+3V3 on Internal Plane 2 (split plane): 89.033,88.402 42.302,88.402 42.302,90.6 42.293,90.698 42.264,90.792 42.218,90.879 42.155,90.955 42.079,91.018 41.992,91.064 41.898,91.093 41.8,91.102 36.3,91.102 36.202,91.093 36.108,91.064 36.021,91.018 35.945,90.955 35.882,90.879 35.836,90.792 35.807,90.698 35.798,90.6 35.798,81.002 26.3,81.002 26.202,80.993 26.108,80.964 26.021,80.918 25.945,80.855 25.882,80.779 25.836,80.692 25.807,80.598 25.798,80.5 25.798,76.4 25.807,76.302 25.836,76.208 25.882,76.121 25.945,76.045 26.021,75.982 26.108,75.936 26.202,75.907 26.3,75.898 51.8,75.898 51.898,75.907 51.992,75.936 52.079,75.982 52.155,76.045 52.218,76.121 52.264,76.208 52.293,76.302 52.302,76.4 52.302,83.298 81.133,83.298 81.133,73.5 81.143,73.402 81.171,73.308 81.218,73.221 81.28,73.145 81.356,73.082 81.443,73.036 81.538,73.007 81.636,72.998 92.735,72.998 92.833,73.007 92.928,73.036 93.015,73.082 93.091,73.145 93.153,73.221 93.2,73.308 93.228,73.402 93.238,73.5 93.238,83.498 128.198,83.498 128.198,27.2 128.207,27.102 128.236,27.008 128.282,26.921 128.345,26.845 128.421,26.782 128.508,26.736 128.602,26.707 128.7,26.698 137.2,26.698 137.298,26.707 137.392,26.736 137.479,26.782 137.555,26.845 137.618,26.921 137.664,27.008 137.693,27.102 137.702,27.2 137.702,32 137.693,32.098 137.664,32.192 137.618,32.279 137.555,32.355 137.479,32.418 137.392,32.464 137.298,32.493 137.2,32.502 135.002,32.502 135.002,78.098 154.098,78.098 154.098,61.1 154.098,45.5 154.107,45.402 154.136,45.308 154.182,45.221 154.245,45.145 154.321,45.082 154.408,45.036 154.502,45.007 154.6,44.998 199.4,44.998 199.49,45.006 199.49,20.51 20.51,20.51 20.51,99.49 89.033,99.49

## Other copper
Internal Plane 1 (plane layer: these items are gaps in the copper):
  lines w0.254: 118.821,38.43 118.948,38.43
  lines w0.381: 112.954,41.783 109.372,41.783 109.372,53.848 117.881,53.848 117.881,50.749 124.968,50.749 125.959,50.749 125.959,46.203 118.948,46.203 118.948,41.783 118.948,38.43 ; 112.979,41.783 112.979,38.43 118.821,38.43
Internal Plane 2 (plane layer: these items are gaps in the copper):
  lines w0.254: 89.535,100.025 90.272,100.025 ; 108.4,99.4 199.4,99.4 199.4,45.5
  lines w0.381: 109.372,38.938 109.372,52.273 109.372,53.772 117.831,53.772 117.831,50.749 118.948,50.749 123.977,50.749 123.977,48.981 123.977,47.984 123.977,46.215 118.948,46.215 118.948,41.681 118.948,38.938 109.372,38.938
  lines w1: 89.535,100.025 89.535,87.9 41.8,87.9 41.8,90.6 36.3,90.6 36.3,80.5 30.6,80.5 26.3,80.5 26.3,76.4 51.8,76.4 51.8,83.8 81.636,83.8 81.636,73.5 92.735,73.5 92.735,84 121.1,84 128.7,84 128.7,27.2 137.2,27.2 137.2,32 134.5,32 134.5,78.6 154.6,78.6 154.6,61.1 154.6,45.5 199.4,45.5

## Silkscreen, mask and mechanical layers (free items; w line width, h text height)
Top Overlay:
  circle w0.254: c105.181,41.986 r0.254
  text "Revision 1.0" at 147.168,41.402 h0.7
  text "Largely based on Johannes Hueber's design for the open inverter mainboard" at 147.269,38.303 h0.7
Mechanical 1:
  the board outline again, w0.254

## Text inside footprints (layer, text, board x,y; h text height)
"3V3 LED": Mechanical 18 "C" at 26.595,64.624 h0.7 r180; Mechanical 18 "A" at 26.608,62.024 h0.7 r180
"5V LED": Mechanical 18 "C" at 194.807,69.111 h0.7 r180; Mechanical 18 "A" at 194.82,66.511 h0.7 r180
LD1: Mechanical 18 "C" at 95.805,60.397 h0.7 r180; Mechanical 18 "A" at 95.817,57.797 h0.7 r180